# Altium PCB power_supply_pcb.PcbDoc
Units mm, origin at the board's own origin, x right, y up, seen from the top; angles counter-clockwise.
Board outline 52 x 90 mm, 2 copper layers (Top Layer, Bottom Layer); 9 components, 6 nets, 34 pads, 0 vias.
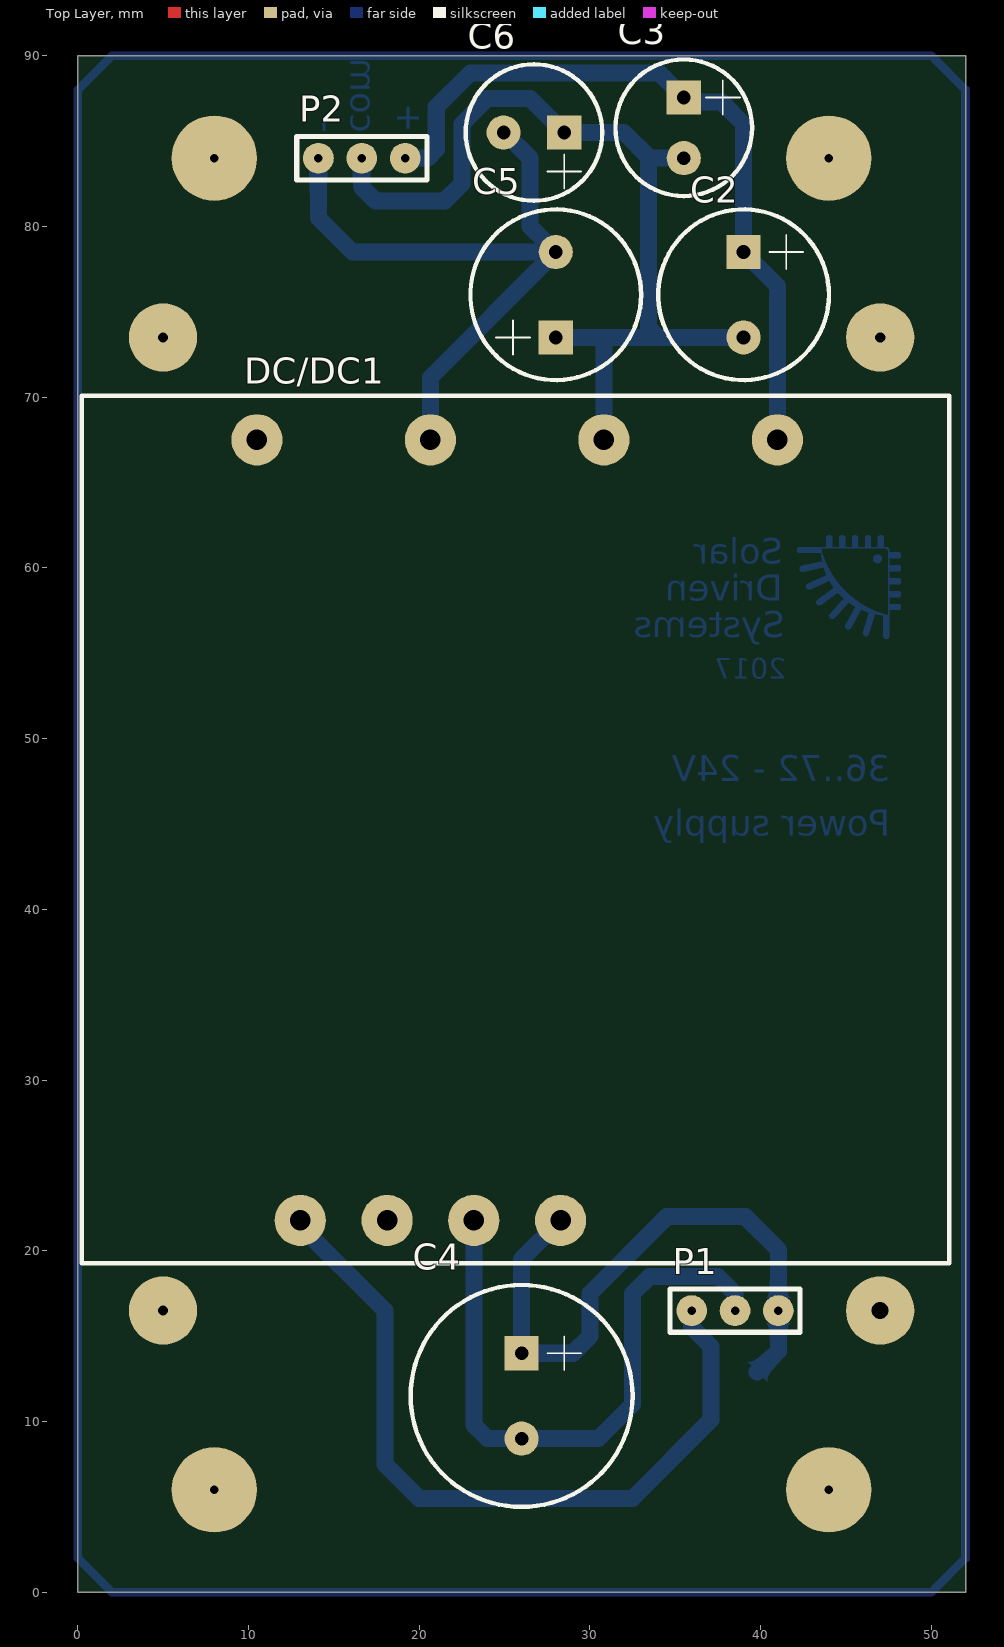
[diagram p0: Top Layer view]
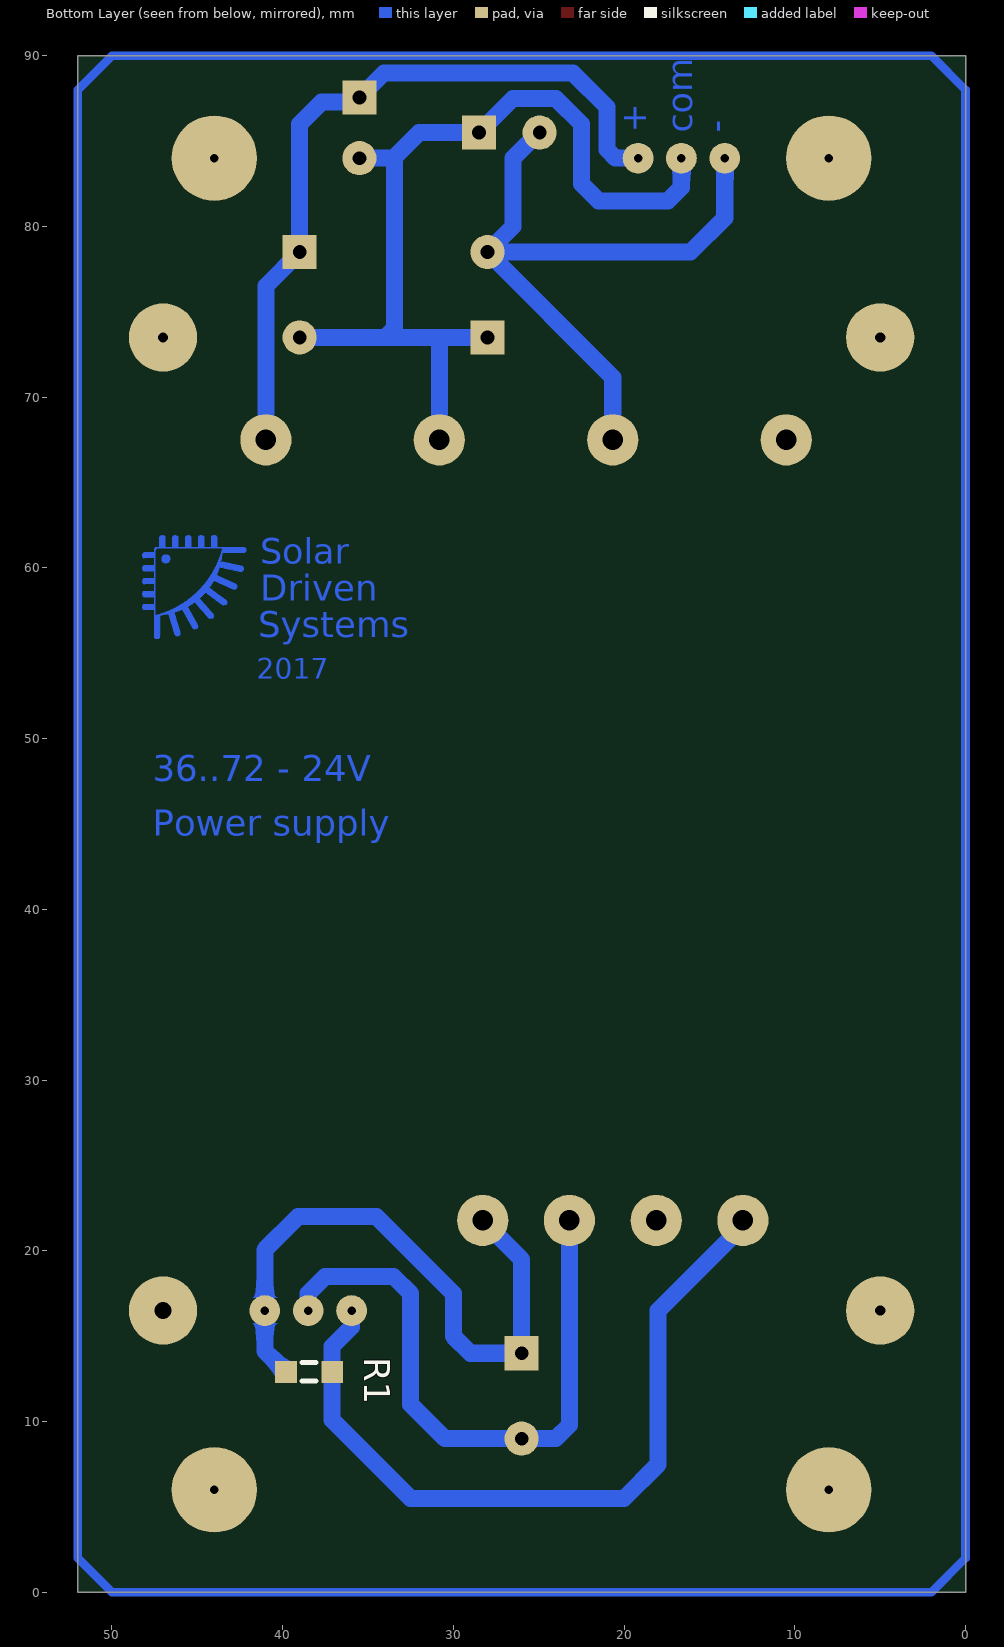
[diagram p1: Bottom Layer view, seen from below]
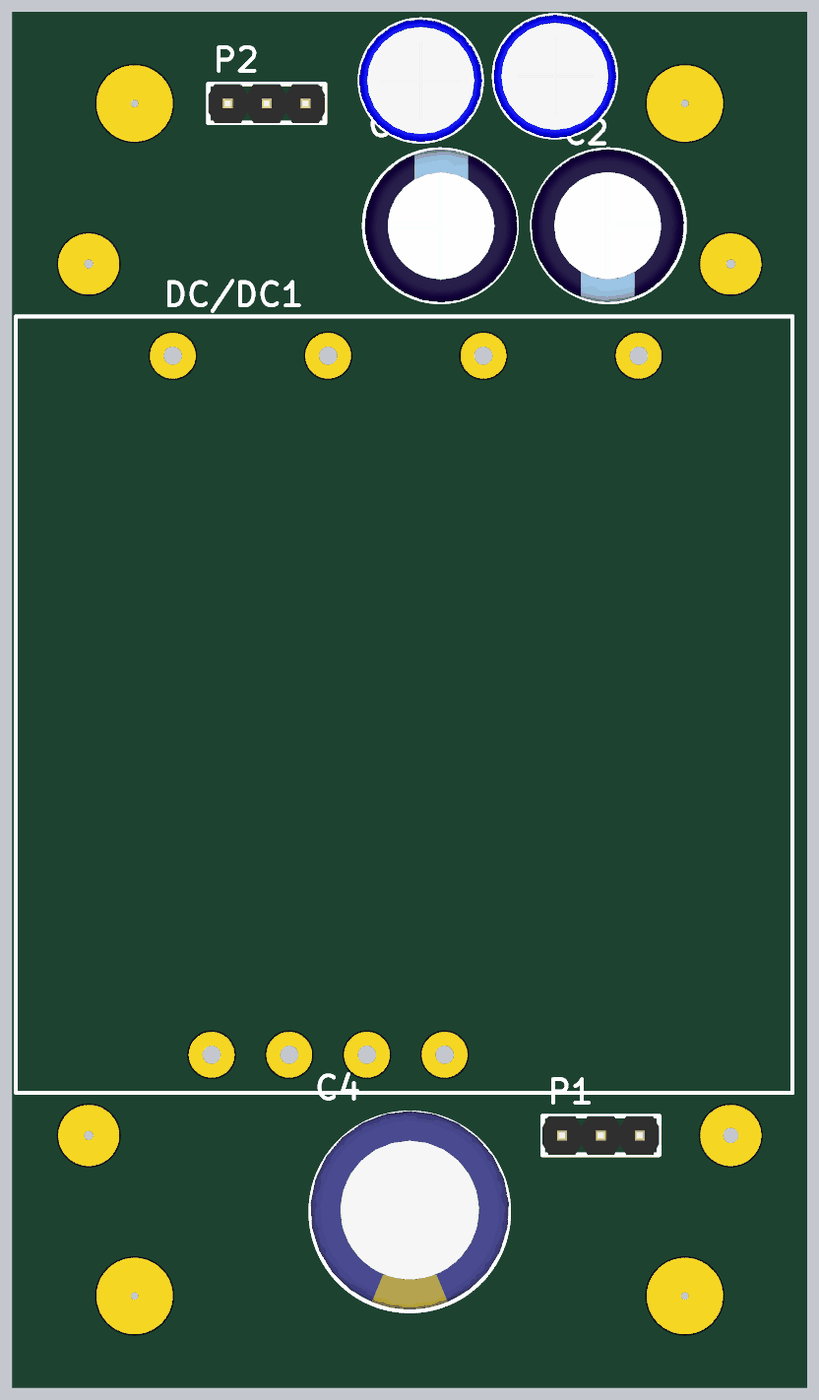
[diagram p2: 3D render of the assembled board from above, using the file's embedded part models]

## Layer stack, top to bottom
Top Solder: solder mask 0.0102, Solder Resist, Dk 3.5
Top Layer: signal copper 0.0356
Dielectric 1: dielectric 0.32, FR-4, Dk 4.8
Bottom Layer: signal copper 0.0356
Bottom Solder: solder mask 0.0102, Solder Resist, Dk 3.5

## Board outline
0,0 0,90 52,90 52,0

## Design rules (kind name [scope] priority, off if disabled: settings)
Clearance Poly_Clearence [All vs InPoly] p1: gap=1
Clearance Clearance_1 [All] p2: gap=0.254
PolygonConnect [All] p1: connectstyle=Relief reliefconductorwidth=0.254 reliefentries=4 polygonreliefangle="90 Angle" airgapwidth=0.254
RoutingVias [All] p1: holewidth=0.711 width=1.27 viastyle="Through Hole" minholewidth=0.711 minwidth=1.27 maxholewidth=0.711 maxwidth=1.27
SolderMaskExpansion [All] p1: expansion=0.102
Width [All] p1: maxlimit=2 minlimit=0.254 preferedwidth=0.5
30 further rules are at their usual default settings.

## Components (designator, comment, footprint, x,y, rotation, side; value= is the part's Value field where it differs from the comment)
C2 "470uF 25V" "Cond 10mm 25V" 39,78.5 r270 top
C3 "220uF 25V" "Cond 8mm 25V" 35.5,87.556 r270 top
C4 "470uF 63V" "Cond 12mm 63V" 26,14 r270 top
C5 "470uF 25V" "Cond 10mm 25V" 28,73.5 r90 top
C6 "220uF 25V" "Cond 8mm 25V" 28.5,85.5 r180 top
DC/DC1 "DKA30C-12" MW_DKA30C-12 40.98,21.78 r0 top
P1 "Pins 3x2.54" "Pins 3x2.54" 41.04,16.5 r180 top
P2 "Pins 3x2.54" "Pins 3x2.54" 19.18,84 r180 top
R1 "10K" R0805 39.8,12.9 r180 bottom

## Footprints (in the part's own frame and the unit in brackets; to place one, negate y for a bottom-side part, rotate by r counter-clockwise, add the part's x,y. Pads: shape width x height; smd on the part's side, far side on the other; paste and mask are expansions set on the pad)
"Cond 8mm 25V" [mm]
  rect 2x2 hole 0.8: 1(0,0)
  round 2 hole 0.8: 2(3.556,0)
  silkscreen extent -2.22,-4 5.78,4, body extent -2.25,-4.03 5.8,4.03, height 12.03
"Cond 10mm 25V" [mm]
  rect 2x2 hole 0.8: 1(0,0)
  round 2 hole 0.8: 2(5,0)
  silkscreen extent -2.5,-5 7.5,5, body extent -2.51,-5.05 7.49,4.95, height 16.5
"Cond 12mm 63V" [mm]
  rect 2x2 hole 0.8: 1(0,0)
  round 2 hole 0.8: 2(5,0)
  silkscreen extent -4,-6.5 9,6.5, body extent -4.11,-6.5 8.89,6.5, height 22
MW_DKA30C-12 [mm]
  round 3 hole 1.2: 1(-27.94,0) 2(-22.86,0) 3(-17.78,0) 4(-12.7,0) 5(0,45.72) 6(-10.16,45.72) 7(-20.32,45.72) 8(-30.48,45.72)
  silkscreen extent -40.74,-2.5 10.06,48.3, body extent -40.49,-2.29 9.91,48.01, height 21
"Pins 3x2.54" [mm]
  round 1.8 hole 0.5: 1(0,0) 2(2.54,0) 3(5.08,0)
  silkscreen extent -1.27,-1.27 6.35,1.27, body extent -1.27,-1.27 6.35,1.27, height 8.81
R0805 [mm]
  rect 1.27x1.27 smd: 1(0,0) 2(2.7,0)
  silkscreen extent 0.94,-0.53 1.75,0.56, body extent 0.35,-0.62 2.35,0.63, height 0.61

## Part data
C2 C3 C4 C5 C6: library part Cond_polar
DC/DC1: library part MW_DKA30C-12
R1: library part Resistor

## Free pads (board coordinates)
  round 4 hole 0.6: 1(5,16.5) 2(5,73.5) 3(47,73.5)
  round 4 hole 1: 4(47,16.5)
  round 5 hole 0.5: 5(8,84) 6(44,84) 7(44,6) 8(8,6)

## Nets (pads, with @x,y where several pads share a name; then routed paths per layer and width w, separated by ;. In a path a pad name is that pad's centre, name@x,y a point inside that pad or via, vN(x,y) a via of type N, cw(c..) or ccw(c..) an arc to the next point about the centre after c; other vN are vias at no path point)
+V: C2.1 C3.1 DC/DC1.5 P2.1 | length 44.1
  Bottom Layer w1: P2.1 20.5,84 21,84.5 21,86.996 23,88.996 34.06,88.996 C3.1 ; C3.1@35.222,87.278 37.722,87.278 39,86 C2.1 40.98,76.52 DC/DC1.5
+VIN: C4.1 DC/DC1.4 P1.1 R1.1 | length 37
  Bottom Layer w1: DC/DC1.4 26,19.5 C4.1 29,14 30,15 30,17.5 34.5,22 39.1,22 41.04,20.06 P1.1 41.04,14.14 R1.1
-V: C5.2 C6.2 DC/DC1.7 P2.3 | length 40.6
  Bottom Layer w1: P2.3 14.1,80.5 16.1,78.5 C5.2 ; DC/DC1.7 20.66,71.16 C5.2 ; C6.2 25,85.5 26.5,84 26.5,80 C5.2
-VIN: C4.2 DC/DC1.3 P1.2 | length 36.8
  Bottom Layer w1: DC/DC1.3 23.2,9.8 24,9 C4.2 30.5,9 32.5,11 32.5,17.5 33.5,18.5 37.5,18.5 38.5,17.5 P1.2
COM: C2.2 C3.2 C5.1 C6.1 DC/DC1.6 P2.2 | length 54.7
  Bottom Layer w1: P2.2 16.64,82.29 17.43,81.5 21.5,81.5 22.5,82.5 22.5,86 24,87.5 26.5,87.5 C6.1 32,85.5 33.5,84 C3.2 ; C5.1 31,73.5 ; DC/DC1.6 30.82,73.32 31,73.5 ; 33.444,84 33.444,74.056 34,73.5 ; C2.2 34,73.5 ; 31,73.5 34,73.5
NetDC/DC1_1: DC/DC1.1 P1.3 R1.2 | length 44.9
  Bottom Layer w1: DC/DC1.1@12.88,21.62 18,16.5 18,7.5 20,5.5 32.5,5.5 37.1,10.1 R1.2 37.1,14.4 35.96,15.54 P1.3
pads on no net: DC/DC1.2 DC/DC1.8
copper on no net: | length 279.3
  Bottom Layer w0.5: 0,2 0,88 2,90 50,90 52,88 52,2 50,0 2,0 0,2

## Polygon pours and split planes (outlines as drawn)
no net on Bottom Layer "Bottom Layer-No Net" (solid, shelved, pour order 0): 0,88 2,90 50,90 52,88 52,2 50,0 2,0 0,2

## Other copper
Bottom Layer:
  region: 211 vertices and 0 holes, not listed, extent 46.584,60.271 47.091,60.779
  region: 5841 vertices and 6 holes, not listed, extent 42.134,55.841 48.214,61.901
  pour cut-out: 30.54,64 ccw(c30.54,61.46) 28,61.46 28,44.54 ccw(c30.54,44.54) 30.54,42 47.46,42 ccw(c47.46,44.54) 50,44.54 50,61.46 ccw(c47.46,61.46) 47.46,64
  text "-" at 15,85.5 h1.5 r90
  text "com" at 16,85.5 h1.5 r270
  text "+" at 20,85.5 h1.5 r90
  text "Solar" at 41.298,60.246 h1.5
  text "Driven" at 41.298,58.087 h1.52
  text "Systems" at 41.425,55.928 h1.52
  text "2017" at 41.5,53.5 h1.2
  text "36..72 - 24V" at 47.6,47.5 h1.52
  text "Power supply" at 47.6,44.3 h1.52